# EAGLE board ELE-T300 (EAGLE 4.11)
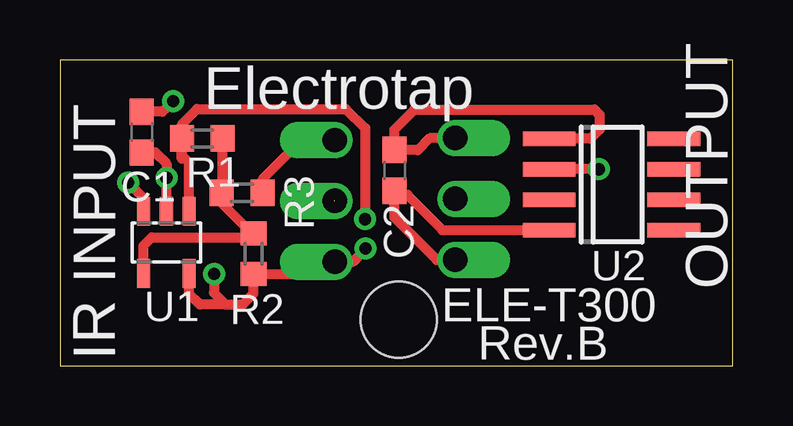
[diagram p0: board, top side]
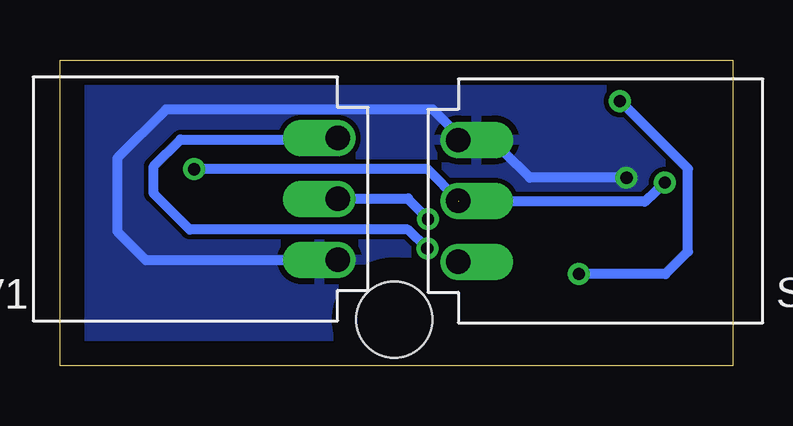
[diagram p1: board, bottom side, seen from below]

Size 28.06 x 12.75 mm. Coordinates in mm from the lower left corner, seen from the top.
Outline: 0,0 28.06,0 28.06,12.75 0,12.75 0,0
Copper layers (1*16): Top 0.035mm / dielectric 1.5mm / Bottom 0.035mm
Design rules "default": minimum track width 10mil, minimum drill 20mil, track to track 8mil, track to pad 8mil, pad to pad 8mil, via to via 8mil, smd to smd 8mil, copper to edge 40mil, drill to drill 8mil, minimum pad ring 10mil, minimum via ring 8mil, stop-mask expansion 4mil, vias tented up to drill 0mil, thermal gap 10mil
Holes 3.17 mm at 14.12,1.92

## Footprints (pad centres in the part's own frame; a part is rotated, then mirrored left to right if it is on the bottom)
C0603 = smd 1.1 x 1: 1 -0.85,0; 2 0.85,0
R0603 = smd 1 x 1.1: 1 -0.85,0; 2 0.85,0
JACK_MOLEX_3PIN_RA = drill 1.016 offset: 5V 0,0; GND 0,5.08; SENSOR 0,2.54
SOT23-5 = smd 0.55 x 1.2: 1 -0.95,-1.3; 2 0,-1.3; 3 0.95,-1.3; 4 0.95,1.3; 5 -0.95,1.3
SOIC8 = smd 0.6 x 2.2: 1 -1.905,-2.6; 2 -0.635,-2.6; 3 0.635,-2.6; 4 1.905,-2.6; 5 1.905,2.6; 6 0.635,2.6; 7 -0.635,2.6; 8 -1.905,2.6

## Placement (x,y rotation side)
C1  .1uF  [C0603]  3.41,9.74 270 top
C2  .1uF  [C0603]  13.95,8.15 270 top
R1  4.3K (IR) / 6.8K-7.15K (Temp)  [R0603]  5.94,9.48 180 top
R2  47K / 15K  [R0603]  8.07,4.67 270 top
R3  5.1K  [R0603]  7.59,7.21 180 top
SV1  JACK_MOLEX_3PINRA_MALE  [JACK_MOLEX_3PIN_RA]  16.48,9.5 180 bottom
SV3  JACK_MOLEX_3PINRA_MALE  [JACK_MOLEX_3PIN_RA]  11.45,4.33 0 bottom
U1  AD8515  [SOT23-5]  4.44,5.14 180 top
U2  AD22100  [SOIC8]  23,7.56 270 top

## Library data of the parts
C1 C2 SV1 SV3 U1 U2 = TEABOX-LIB
R1-R3 = rcl

## Nets
+5V: C1.1 C2.1 R2.2 SV1.5V SV3.5V U1.5 U2.1
GND: C1.2 C2.2 R3.1 SV1.GND SV3.GND U1.2 U2.4
N$1: SV3.SENSOR U1.3 U2.2
N$2: R1.2 SV1.SENSOR U1.1
N$3: R1.1 R2.1 R3.2 U1.4

## Tracks (layer width: path | path; a pad name or v marks a point on that pad's centre or on a via)
+5V  (via drill 0.51)
  Top 0.406: R2.2 10.92,3.82 | 10.92,3.82 10.92,3.8 | U1.5 5.39,3 5.84,2.55 6.9,2.55 | 6.9,2.55 7.62,2.55 8.07,3.01 R2.2 | R2.2 8.45,3.82 | 14.92,9 C2.1 13.95,9.02 13.94,9.03 13.94,9.84 14.78,10.68 22.3,10.68 22.5,10.48 22.5,9.84 22.12,9.46 U2.1 20.47,9.39 | 14.92,9 15.41,9.49 16.45,9.49 16.45,9.5 SV1.5V | C1.1 4.27,10.59 v4.72,11.04 | v6.42,3.82 6.42,3.04 6.9,2.55 | 14.92,9 14.92,8.99 | 10.92,3.82 SV3.5V 12.21,4.33 v12.75,4.89
  Bottom 0.406: v4.72,11.04 4.69,11.04 1.87,8.22 1.87,4.76 2.81,3.82 v6.42,3.82 | v12.75,4.89 13.56,5.68 22.65,5.68 24.15,7.18 24.15,8.32 23.03,9.44 16.43,9.44 16.38,9.49 16.4,9.49 16.45,9.54 16.48,9.51 SV1.5V
GND  (via drill 0.51)
  Top 0.406: R3.1 8.45,7.78 10.08,9.41 SV3.GND | SV3.GND 11.48,9.39 | C2.2 13.94,7.28 13.94,7.12 | 13.94,7.12 13.94,6.18 15.72,4.41 SV1.GND | SV1.GND 16.51,4.41 | SV1.GND | U1.2 4.44,7.58 v4.44,7.84 4.44,8.42 3.97,8.89 C1.2 | U2.4 15.95,5.65 14.5,7.12 13.94,7.12 | 11.2,9.66 SV3.GND | SV3.GND 11.22,9.64
  Bottom 0.406: SV1.GND 24.48,4.41 25.67,5.6 25.67,8.65 23.64,10.68 12.52,10.68 11.48,9.64 10.99,9.39 10.71,9.41 9.55,8.9 8.48,7.84 v4.44,7.84
  pour Bottom: 0.3,12.43 27.78,12.41 27.78,0.32 0.3,0.34
N$1  (via drill 0.51)  (1 unrouted)
  Top 0.406: v22.47,8.19 U2.2 | U1.3 3.5,6.46 3.5,6.97 v2.84,7.63
  Bottom 0.406: v22.47,8.19 12.75,8.19 11.43,6.87 10.84,6.87 10.84,6.85 | v2.84,7.63 3.68,6.85 10.84,6.85 | 10.84,6.85 10.92,6.85
N$2  (via drill 0.51)
  Top 0.406: U1.1 5.39,8.46 5.09,8.76 | v12.72,6.11 12.72,9.92 11.91,10.71 5.71,10.71 5.08,10.05 5.08,8.62 5.09,8.64 5.09,8.76 | 5.09,8.76 R1.2
  Bottom 0.406: v12.72,6.11 13.56,6.95 | 13.56,6.95 13.57,6.96 | 13.53,6.96 13.53,6.95 13.56,6.95 | 13.53,6.96 SV1.SENSOR | 13.53,6.96 13.53,6.97
N$3
  Top 0.406: U1.4 3.49,5 3.83,5.35 8.05,5.35 | R2.1 7.97,5.42 8.25,5.35 8.05,5.35 | 6.79,7.21 6.8,7.2 | 6.79,7.21 R3.2 6.74,6.78 8.05,5.47 8.05,5.35 | R1.1 6.79,7.21

## Text on the board
tPlace: Electrotap | OUTPUT | ELE-T300 | IR INPUT | Rev.B